# Altium PCB HGD_Sensor(v0.1)-20200807.PcbDoc (part 1 of 3)
Units mil, origin at the board's own origin, x right, y up, seen from the top; angles counter-clockwise.
Board outline 2299.21 x 2125.98 mil, 2 copper layers (TopLayer, BottomLayer); 55 components, 33 nets, 176 pads, 331 vias.
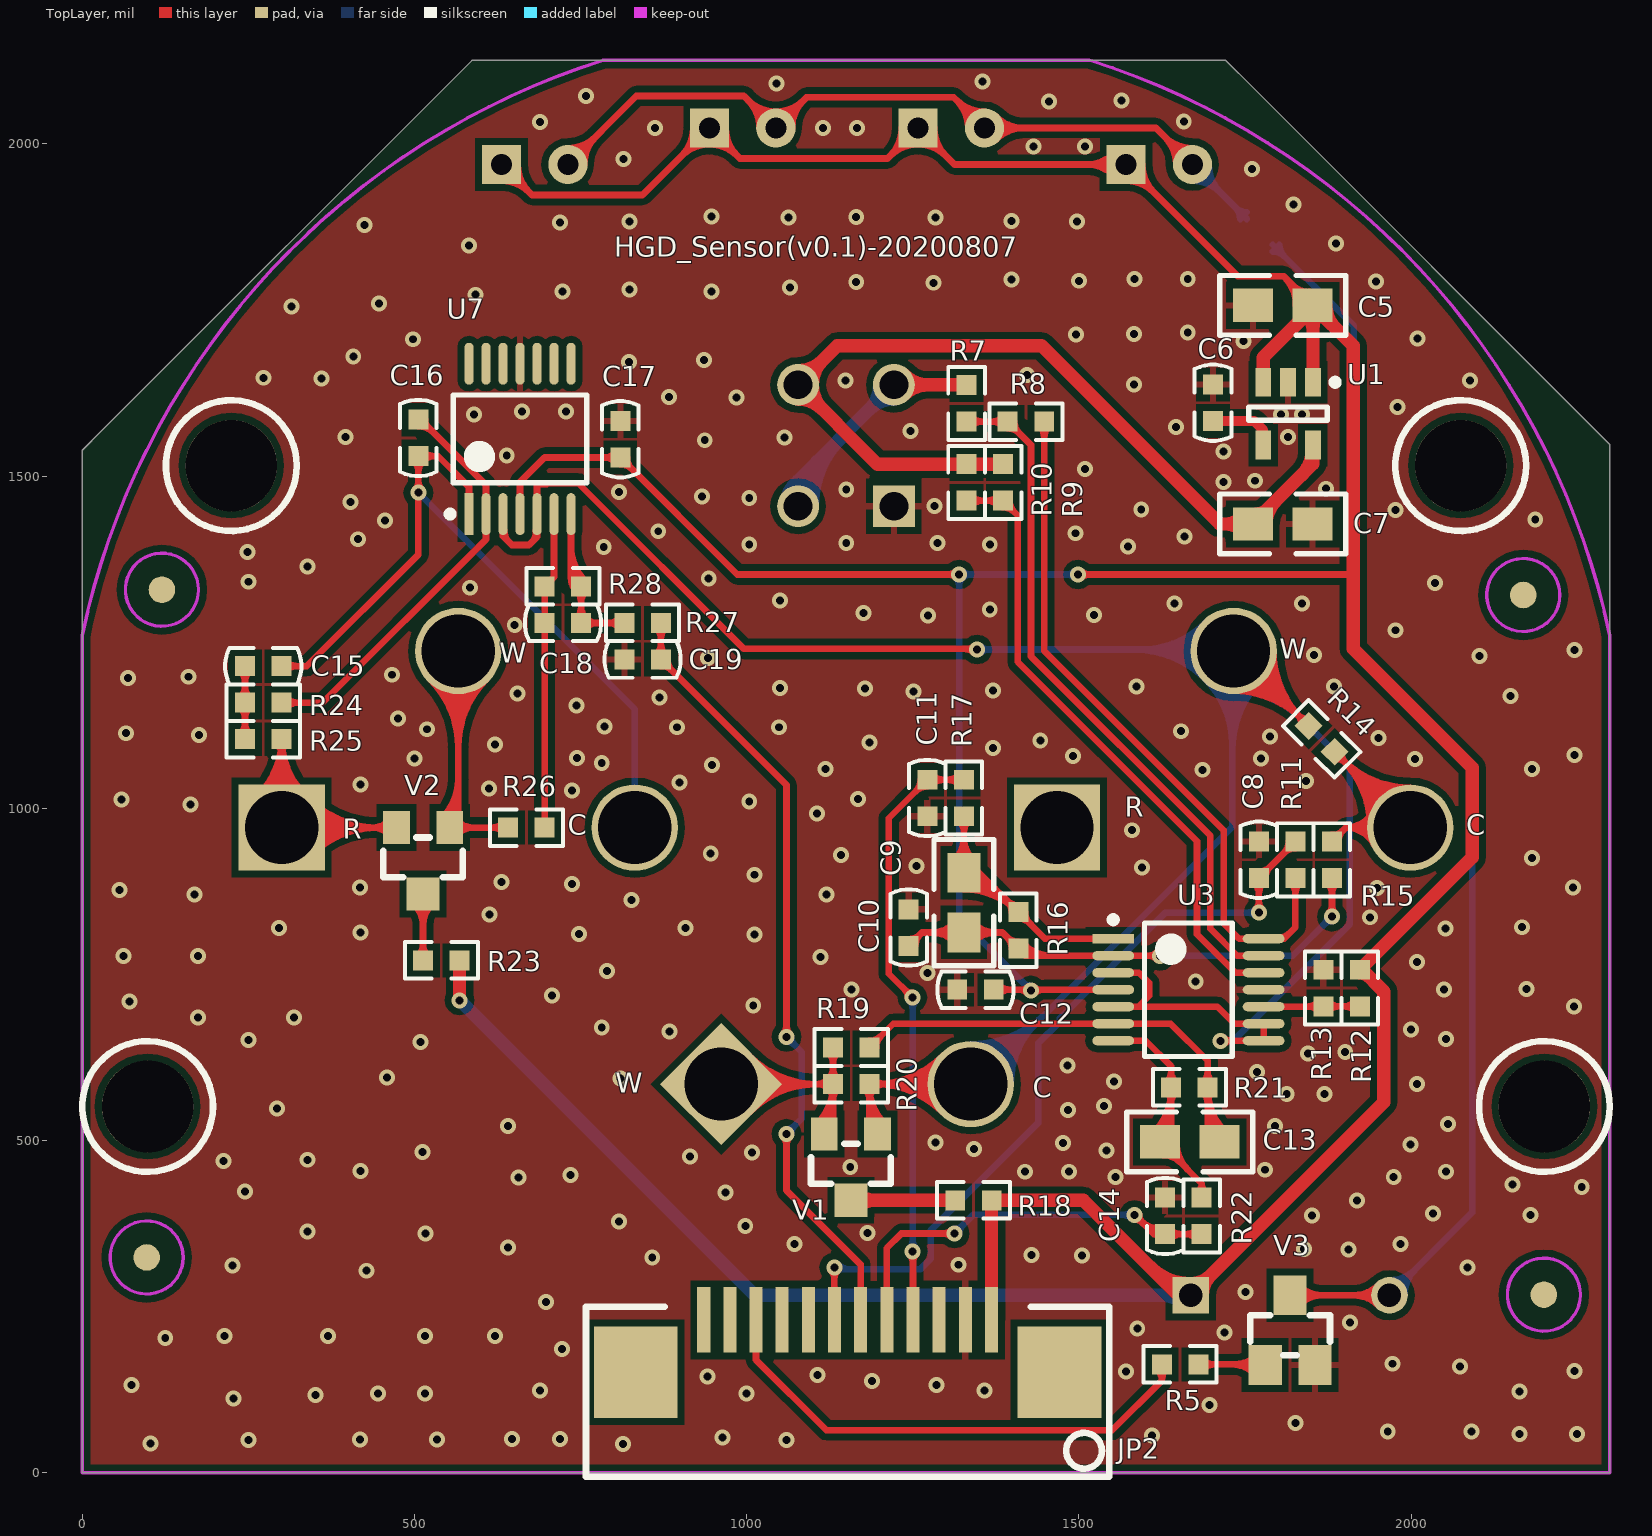
[diagram p0: TopLayer view]
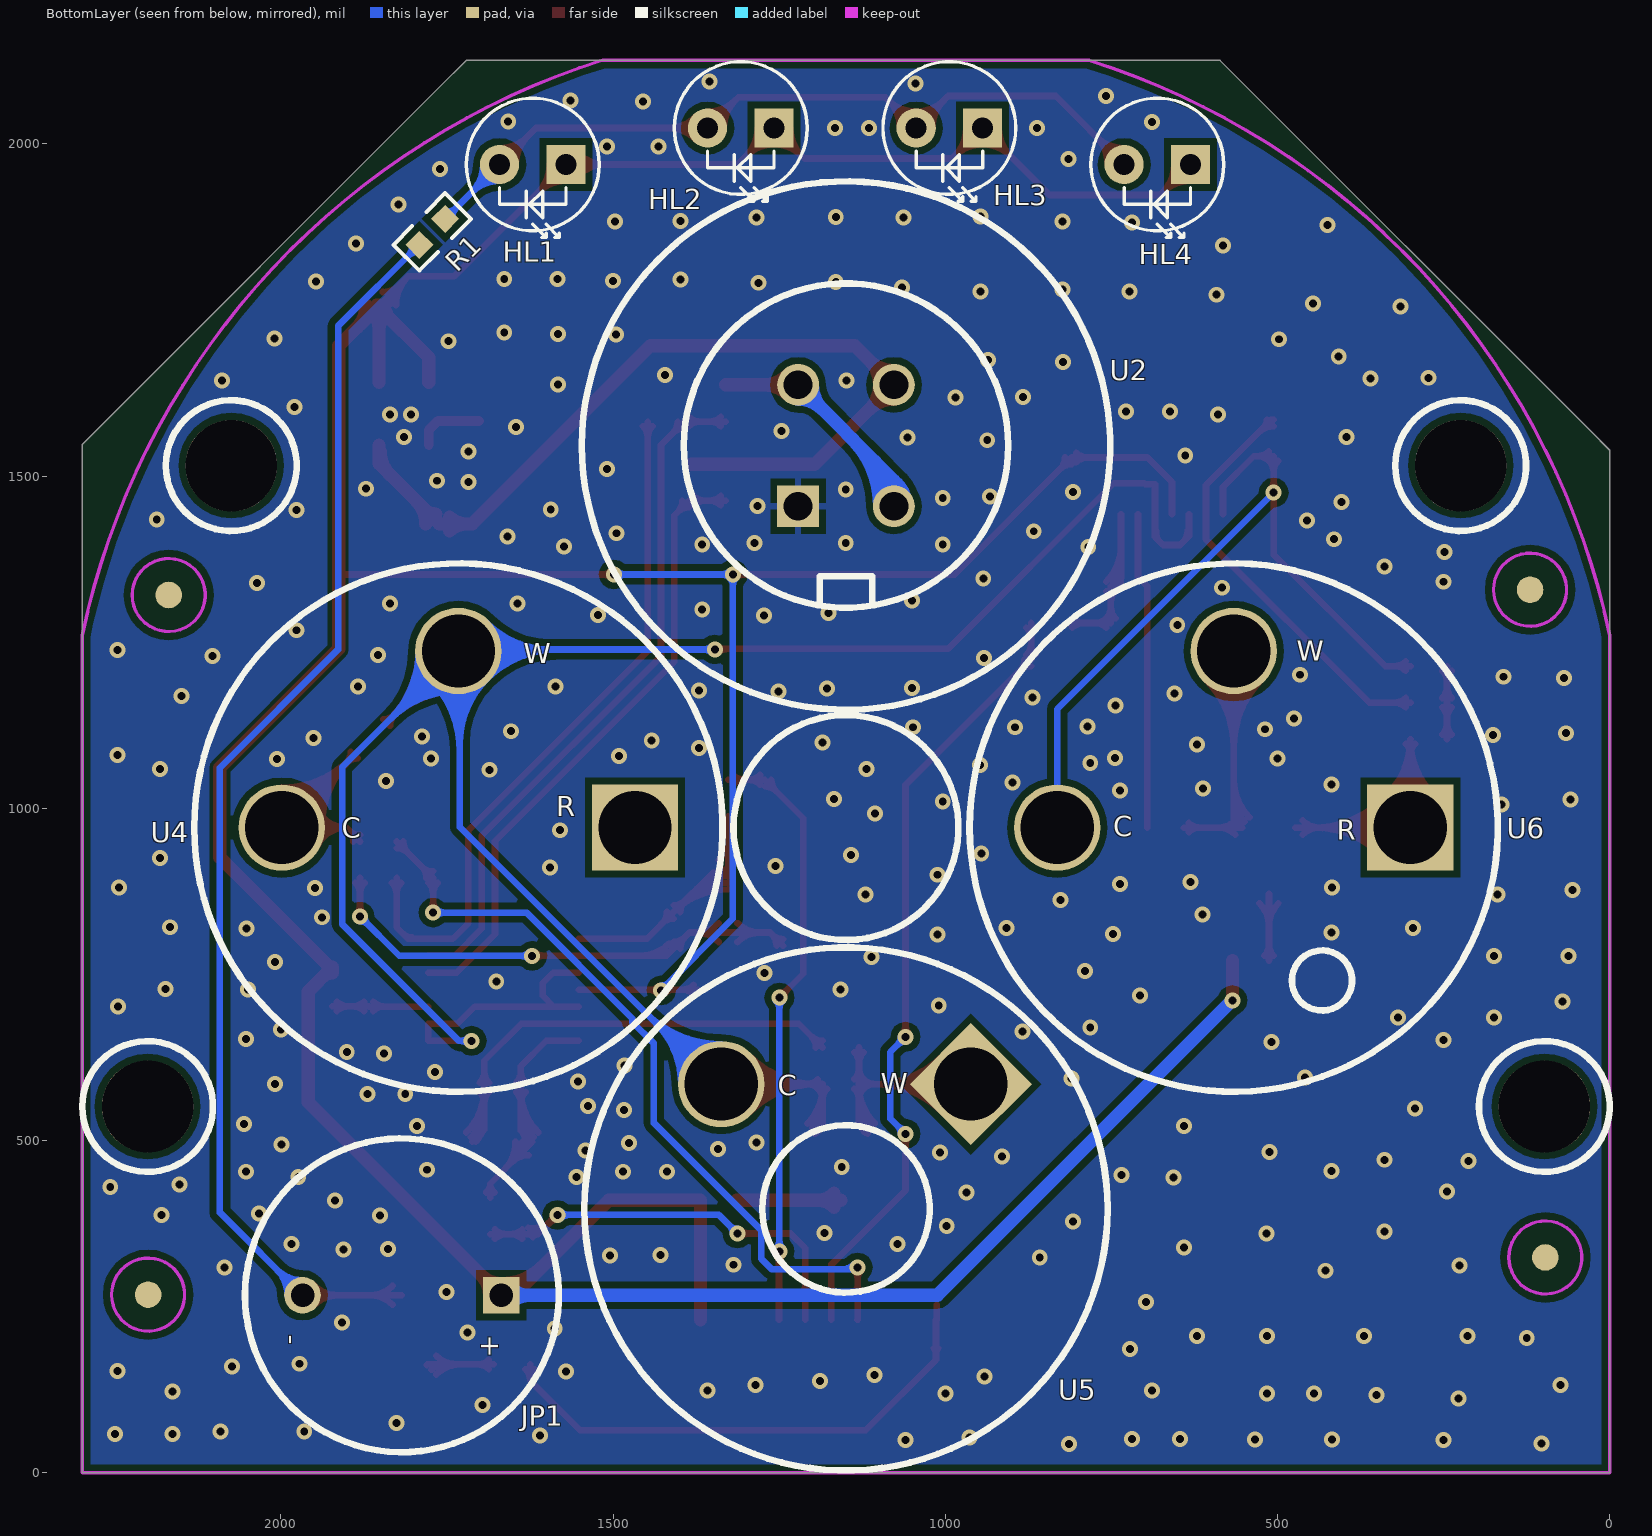
[diagram p1: BottomLayer view, seen from below]

## Layer stack, top to bottom
TopLayer: signal copper 1.4
Dielectric: core 12.6, FR-4, Dk 4.8
BottomLayer: signal copper 1.4

## Board outline
0,0 2299.21,0 2299.21,1547.79 1762,2085 1721.02,2125.98 1515.75,2125.98 783.99,2125.98 783.59,2125.59 586.59,2125.59 30,1569 0,1539 0,1259.84 0,0

## Design rules (kind name [scope] priority, off if disabled: settings)
Clearance Clearance_2 [InNet('RF_IN') vs InNet('GND')] p1: gap=19.68
Clearance [All] p2: gap=10
Clearance Clearance_1 [All] p3: gap=10
ComponentClearance [All] p1 off: gap=10 collisioncheckmode=3 verticalgap=10 showdistances=FALSE
FabricationTestPointUsage TestPointUsage [All] p1: valid=0 allowmultiple=FALSE
FabricationTestpoint Testpoint [(IsPad And (OnTopLayer Or OnBottomLayer))] p1: side=3 testpointundercomponent=TRUE minsize=40 maxsize=100 preferedsize=60 minholesize=20 maxholesize=40 preferedholesize=32 testpointgrid=1 allowsidetop=TRUE allowsidebottom=TRUE usegrid=TRUE gridtolerance=0.01
HoleSize [All] p1: absolutevalues=TRUE maxlimit=200 minlimit=1 maxpercent=80.000 minpercent=20.000
PolygonConnect [IsVia] p1: connectstyle=Direct reliefconductorwidth=10 reliefentries=4 polygonreliefangle="90 Angle"
PolygonConnect PolygonConnect_via [All] p2 off: connectstyle=Relief reliefconductorwidth=10 reliefentries=4 polygonreliefangle="90 Angle"
RoomDefinition HGD_Sensor(v0.1)-20200807 [InComponentClass('HGD_Sensor(v0.1)-20200807')] p1: confinementstyle=ConfineIn formatcopy=TRUE lockcomponents=FALSE outline -14648,-34893 -12648,-34893 -12648,-33893 -14648,-33893
RoutingVias [All] p1: holewidth=15.75 width=31.5 viastyle="Through Hole" minholewidth=11.81 minwidth=23.62 maxholewidth=19.68 maxwidth=39.37
ShortCircuit [All] p1 off: allowed=FALSE
SilkscreenOverComponentPads [All] p1: minsilkscreentomaskgap=10
SolderMaskExpansion [All] p1: expansion=4
Width [All] p1: maxlimit=100 minlimit=5 preferedwidth=10
22 further rules are at their usual default settings.

## Components (designator, comment, footprint, x,y, rotation, side; value= is the part's Value field where it differs from the comment)
C5 "1uF/25V/5%" 0805 1852,1757 r180 top
C6 "10nF/25V/5%" C0603 1702,1583 r90 top
C7 "1uF/25V/5%" 0805 1762,1428 r0 top
C8 "10nF/25V/5%" C0603 1771,895 r90 top
C9 "1uF/25V/5%" 0805 1327,813 r90 top
C10 "10nF/25V/5%" C0603 1244,793 r90 top
C11 "10nF/25V/5%" C0603 1272,1043 r270 top
C12 "100nF/25V/5%" C0603 1317,727 r0 top
C13 "1uF/25V/5%" 0805 1712,498 r180 top
C14 "10nF/25V/5%" C0603 1630,359 r90 top
C15 "10nF/25V/5%" C0603 300,1214 r180 top
C16 "10nF/25V/5%" C0603 506,1585 r270 top
C17 "100nF/25V/5%" C0603 810,1583 r270 top
C18 "10nF/25V/5%" C0603 751,1279 r180 top
C19 "10nF/25V/5%" C0603 871,1224 r180 top
HL1 "LED红灯" LED-3MM 1571,1969 r0 bottom locked
HL2 "LED红灯" LED-3MM 1258,2023.87 r0 bottom locked
HL3 "LED红灯" LED-3MM 944,2023.87 r0 bottom locked
HL4 "LED红灯" LED-3MM 631,1969 r0 bottom locked
JP1 "TMB-12A03" TMB-12A03 1818,267 r270 bottom locked
JP2 "FPC-12P" FPC-1.0MM-12P-W 1152,230 r180 top
R1 "200R/5%" R0603 1753,1887 r315 bottom
R5 "470R/5%" R0603 1625,163 r0 top
R7 "1K/5%" R0603 1331,1582 r90 top
R8 "4K7/5%" R0603 1448,1582 r180 top
R9 "4K7/5%" R0603 1386,1463 r90 top
R10 "4K7/5%" R0603 1331,1463 r90 top
R11 "10K/5%" R0603 1826,950 r270 top
R12 "4K7/5%" R0603 1923,702 r90 top
R13 "4K7/5%" R0603 1868,702 r90 top
R14 "100R/5%" R0603 1846,1124 r315 top
R15 "470R/5%" R0603 1881,950 r270 top
R16 "10K/5%" R0603 1409,844 r270 top
R17 "10K/5%" R0603 1327,1043 r270 top
R18 "1M/5%" R0603 1314,410 r0 top
R19 "200R/5%" R0603 1185,640 r180 top
R20 "200R/5%" R0603 1130,585 r0 top
R21 "47K/5%" R0603 1694,580 r180 top
R22 "10K/5%" R0603 1685,359 r90 top
R23 "1M/5%" R0603 513,771 r0 top
R24 "10K/5%" R0603 300,1159 r180 top
R25 "10K/5%" R0603 245,1104 r0 top
R26 "100R/5%" R0603 641,971 r0 top
R27 "10K/5%" R0603 816,1279 r0 top
R28 "8K2/5%" R0603 696,1334 r0 top
U1 "SGM2019-3.0YN5G/TR" SGM2019_SOT23-5_95P280X125-5N 1815,1594 r270 top
U2 "MC101" MC101 1149.61,1546 r180 bottom locked
U3 "SGM8634" SGM8634_TSSOP14_65P640X120-14N 1665,727 r0 top
U4 "4O2-GP_V2.0" 4O2-GP_V2.0-1.5K-3.2*2.5*5.8 1733,971 r180 bottom locked
U5 "ME2-CO" ME2-CO_1.5K-3.2*2.5*5.8 1149.61,397 r225 bottom locked
U6 "4H2S-AS_V2.0" 4H2S-AS_V2.0-1.5K-3.0*2.5*5.8 566,971 r180 bottom locked
U7 "SGM8634" SGM8634_TSSOP14_65P640X120-14N 659,1556 r90 top
V1 "MMBFJ177LT1G" MMBFJ177LT1G_SOT-23 1157,455 r180 top
V2 "MMBFJ177LT1G" MMBFJ177LT1G_SOT-23 513,916 r180 top
V3 "S8050" SOT-23 1818,267 r0 top locked

## Footprints (in the part's own frame and the unit in brackets; to place one, negate y for a bottom-side part, rotate by r counter-clockwise, add the part's x,y. Pads: shape width x height; smd on the part's side, far side on the other; paste and mask are expansions set on the pad)
4H2S-AS_V2.0-1.5K-3.0*2.5*5.8 [mm] "4H2S-AS_V2.0：H2S传感器，4系列插针"
  rect 3.3x3.3 hole 2.8: 1(6.75,0)
  round 3.3 hole 2.8: 2(0,6.75) 3(-6.75,0)
  silkscreen extent -10.1,-10.1 10.1,10.1
4O2-GP_V2.0-1.5K-3.2*2.5*5.8 [mm] "4O2-GP_V2.0：O2传感器，4系列插针"
  rect 3.3x3.3 hole 2.8: 1(6.75,0)
  round 3.3 hole 2.8: 2(0,6.75) 3(-6.75,0)
  silkscreen extent -10.1,-10.1 10.1,10.1
0805 [mil]
  rect 60x50 smd: 1(0,0) 2(90,0)
  silkscreen extent -50,-45 140,45
C0603 [mil]
  rect 30x30 smd: 1(0,0) 2(55,0)
  silkscreen extent -30,-28 85,28
FPC-1.0MM-12P-W [mm] "FPC-1.0MM-12P-W：卧式，抽拉式上接，12P"
  rect 3.2x3.5 smd: 0(-8.1,2) 0(8.1,2)
  rect 0.5x2.5 smd: 1(-5.5,0) 2(-4.5,0) 3(-3.5,0) 4(-2.5,0) 5(-1.5,0) 6(-0.5,0) 7(0.5,0) 8(1.5,0) 9(2.5,0) 10(3.5,0) 11(4.5,0) 12(5.5,0)
  silkscreen extent -10,-0.5 10,6
LED-3MM [mm]
  rect 1.5x1.5 hole 0.8: A(0,0)
  round 1.5 hole 0.8: K(2.54,0)
  silkscreen extent -1.27,-2.54 3.81,2.79
MC101 [mm] "MC101：可燃气体传感器"
  rect 1.6x1.6 hole 1.1: 1(-1.83,-2.32)
  round 1.6 hole 1.1: 2(1.83,-2.32) 3(1.83,2.32) 4(-1.83,2.32)
  silkscreen extent -10.1,-10.1 10.1,10.1
ME2-CO_1.5K-3.2*2.5*5.8 [mm] "ME2-CO：CO传感器，4系列插针"
  rect 3.3x3.3 hole 2.8: 1(0,6.75)
  round 3.3 hole 2.8: 2(-6.75,0)
  silkscreen extent -10,-10 10,10
MMBFJ177LT1G_SOT-23 [mil]
  rect 40x50 smd: 1(-40,-55) 2(40,-55)
  rect 50x50 smd: 3(0,45)
  silkscreen extent -60,-40 60,20
R0603 [mil] "R0603封装电阻"
  rect 30x30 smd: 1(0,0) 2(55,0)
  silkscreen extent -28,-27 82,28
SGM2019_SOT23-5_95P280X125-5N [mm] "SOT23, 5-Leads, Body 3.0x3.0mm (max), Pitch 0.95mm, IPC Medium Density"
  rect 1.1x0.6 smd: 1(-1.2,0.95) 2(-1.2,0) 3(-1.2,-0.95) 4(1.2,-0.95) 5(1.2,0.95)
  silkscreen extent -1.32,-1.5 0.25,1.93, body extent -0.85,-1.51 0.85,1.51, height 1.25
SGM8634_TSSOP14_65P640X120-14N [mm] "TSOP, 14-Leads, Body 5.1x4.5mm (max), Pitch 0.65mm, IPC Medium Density"
  rect 1.6x0.35 smd: 1(-2.875,1.95)
  oval 1.6x0.35 smd: 2(-2.875,1.3) 3(-2.875,0.65) 4(-2.875,0) 5(-2.875,-0.65) 6(-2.875,-1.3) 7(-2.875,-1.95) 8(2.875,-1.95) 9(2.875,-1.3) 10(2.875,-0.65) 11(2.875,0) 12(2.875,0.65) 13(2.875,1.3) 14(2.875,1.95)
  silkscreen extent -3,-2.55 1.68,2.8, body extent -2.25,-2.55 2.25,2.55, height 1.2
SOT-23 [mil]
  rect 50x60 smd: B(-37.5,-105) C(0,0) E(37.5,-105)
  silkscreen extent -60,-90 60,-30
TMB-12A03 [mm] "TMB-12A03：3.3V有源蜂鸣器"
  rect 1.4x1.4 hole 0.9: 1(0,3.8)
  round 1.4 hole 0.9: 2(0,-3.8)
  silkscreen extent -6,-6 6,6

## Part data
C5 C6 C7 C8 C9 C10 C11 C12 C13 C14 C15 C16 C17 C18 C19: library part CAP, "电容"
HL1 HL2 HL3 HL4: library part 发光二极管, "发光二极管"
JP1: "TMB-12A03：3.3V有源蜂鸣器"
R1 R5 R7 R8 R9 R10 R11 R12 R13 R14 R15 R16 R17 R18 R19 R20 R21 R22 R23 R24 R25 R26 R27 R28: library part RES2, "电阻"
U1: library part SGM2019, "SGM2019：Low Power, Low Dropout, RF Linear Regulators"
U2: "MC101：可燃气体传感器"
U3 U7: "SGM8634：470μA, 6MHz, Rail-to-Rail I/O, CMOS Operational Amplifier"
U4: "4O2-GP_V2.0：O2传感器"
U5: "ME2-CO：CO传感器"
U6: "4H2S-AS_V2.0：H2S传感器"
V1 V2: "MMBFJ177LT1G：P-JFET?Chopper"
V3: library part NPN, "NPN三极管"

## Free pads (board coordinates)
  round 40 smd far side: 0(97,324) 0(120,1329) 0(2169,1321) 0(2200,268)
  round 137.8 hole 137.8: 0(98.43,551.18) 0(224.41,1515.75) 0(2074.8,1515.75) 0(2200.79,551.18)
  round 40 smd: 1(97,324) 1(120,1329) 1(2169,1321) 1(2200,268)
  round 100 on Bottom Solder: 2(97,324) 2(120,1329) 2(2169,1321) 2(2200,268)
  round 100 on Top Solder: 3(97,324) 3(120,1329) 3(2169,1321) 3(2200,268)

## Via types
v1: diameter 24, hole 12, TopLayer to BottomLayer, tented both sides, 331 vias

## Nets (pads, with @x,y where several pads share a name; then routed paths per layer and width w, separated by ;. In a path a pad name is that pad's centre, name@x,y a point inside that pad or via, vN(x,y) a via of type N, cw(c..) or ccw(c..) an arc to the next point about the centre after c; other vN are vias at no path point)
3V: C7.1 R9.2 R10.2 U1.5 U2.3 | length 2908
  TopLayer w20: U2.3@1077.22,1637 U2.3@1077.56,1637.34 ; R9.2@1383,1518 R10.2@1331,1518 1196.9,1518 U2.3@1077.56,1637.34 ; U1.5@1852.4,1546.76 1852.4,1518.4 C7.1@1762,1428 1712,1428 1444,1696 1136.22,1696 U2.3@1077.56,1637.34 ; U2.3@1077.56,1615.84 cw(c1077.56,1563.95) 1114.26,1600.64 ; U2.3@1077.56,1615.84 cw(c1077.56,1563.95) 1114.26,1600.64 ; U2.3@1077.56,1615.84 cw(c1077.56,1563.95) 1114.26,1600.64 ; U2.3@1077.56,1615.84 cw(c1077.56,1563.95) 1114.26,1600.64 ; U2.3@1077.56,1615.84 cw(c1077.56,1563.95) 1114.26,1600.64 ; U2.3@1077.56,1658.83 ccw(c1077.56,1710.73) 1114.26,1674.03 ; U2.3@1077.56,1658.83 ccw(c1077.56,1710.73) 1114.26,1674.03 ; U2.3@1077.56,1658.83 ccw(c1077.56,1710.73) 1114.26,1674.03 ; U2.3@1077.56,1658.83 ccw(c1077.56,1710.73) 1114.26,1674.03 ; U2.3@1077.56,1658.83 ccw(c1077.56,1710.73) 1114.26,1674.03 ; U2.3@1099.06,1637.34 ccw(c1150.95,1637.34) 1114.26,1600.64 ; U2.3@1099.06,1637.34 cw(c1150.95,1637.34) 1114.26,1674.03 ; U2.3@1099.06,1637.34 cw(c1150.95,1637.34) 1114.26,1674.03 ; U2.3@1099.06,1637.34 ccw(c1150.95,1637.34) 1114.26,1600.64 ; U2.3@1099.06,1637.34 cw(c1150.95,1637.34) 1114.26,1674.03 ; U2.3@1099.06,1637.34 ccw(c1150.95,1637.34) 1114.26,1600.64 ; U2.3@1099.06,1637.34 cw(c1150.95,1637.34) 1114.26,1674.03 ; U2.3@1099.06,1637.34 ccw(c1150.95,1637.34) 1114.26,1600.64 ; U2.3@1099.06,1637.34 cw(c1150.95,1637.34) 1114.26,1674.03 ; U2.3@1099.06,1637.34 ccw(c1150.95,1637.34) 1114.26,1600.64 ; 1720.79,1428 cw(c1720.79,1391.79) C7.1@1746.39,1417.39 ; 1720.79,1428 ccw(c1720.79,1464.21) C7.1@1746.39,1438.61 ; 1720.79,1428 ccw(c1720.79,1464.21) C7.1@1746.39,1438.61 ; 1720.79,1428 cw(c1720.79,1391.79) C7.1@1746.39,1417.39 ; 1720.79,1428 ccw(c1720.79,1464.21) C7.1@1746.39,1438.61 ; 1720.79,1428 cw(c1720.79,1391.79) C7.1@1746.39,1417.39 ; 1720.79,1428 ccw(c1720.79,1464.21) C7.1@1746.39,1438.61 ; 1720.79,1428 cw(c1720.79,1391.79) C7.1@1746.39,1417.39 ; 1720.79,1428 ccw(c1720.79,1464.21) C7.1@1746.39,1438.61 ; 1720.79,1428 cw(c1720.79,1391.79) C7.1@1746.39,1417.39 ; C7.1@1767,1443 ccw(c1767,1467.14) C7.1@1784.07,1450.07 ; C7.1@1767,1443 ccw(c1767,1467.14) C7.1@1784.07,1450.07 ; C7.1@1767,1443 ccw(c1767,1467.14) C7.1@1784.07,1450.07 ; C7.1@1767,1443 ccw(c1767,1467.14) C7.1@1784.07,1450.07 ; C7.1@1767,1443 ccw(c1767,1467.14) C7.1@1784.07,1450.07 ; C7.1@1782,1428 cw(c1830.28,1428) 1796.14,1462.14 ; C7.1@1782,1428 cw(c1830.28,1428) 1796.14,1462.14 ; C7.1@1782,1428 cw(c1830.28,1428) 1796.14,1462.14 ; C7.1@1782,1428 cw(c1830.28,1428) 1796.14,1462.14 ; C7.1@1782,1428 cw(c1830.28,1428) 1796.14,1462.14 ; 1836.22,1502.22 ccw(c1801.53,1536.91) U1.5@1850.59,1536.91 ; 1836.22,1502.22 ccw(c1801.53,1536.91) U1.5@1850.59,1536.91 ; 1836.22,1502.22 ccw(c1801.53,1536.91) U1.5@1850.59,1536.91 ; 1836.22,1502.22 ccw(c1801.53,1536.91) U1.5@1850.59,1536.91 ; 1836.22,1502.22 ccw(c1801.53,1536.91) U1.5@1850.59,1536.91
3V3: C5.1 C12.2 C17.2 HL1.A HL2.A HL3.A HL4.A JP1.1 JP2.1 R12.2 R18.2 R23.2 U1.1 U1.3 U3.4 U7.4 | length 16744.6
  TopLayer w10: HL4.A@654,1946 HL4.A@631,1969 677,1923 843.13,1923 HL3.A@944,2023.87 989.87,1978 1212.13,1978 HL2.A@1258,2023.87 1312.87,1969 HL1.A@1571,1969 1739,1801 1808,1801 C5.1@1852,1757 C5.1@1852.4,1756.6 ; U7.4@659,1442.81 659,1491 696,1528 C17.2@810,1528 986,1352 v1(1320,1352) ; C12.2@1372,727 v1@1419,727 ; 1405,727 v1@1419,727 ; v1(1499,1352) 1913,1352 ; U3.4@1551.81,727 v1@1419,727 ; HL4.A@631,1944.47 cw(c631,1885.26) 672.87,1927.13 ; HL4.A@631,1944.47 cw(c631,1885.26) 672.87,1927.13 ; HL4.A@631,1944.47 cw(c631,1885.26) 672.87,1927.13 ; HL4.A@631,1944.47 cw(c631,1885.26) 672.87,1927.13 ; HL4.A@631,1944.47 cw(c631,1885.26) 672.87,1927.13 ; HL4.A@631,1944.47 cw(c631,1885.26) 672.87,1927.13 ; HL4.A@631,1954.47 cw(c631,1919.4) HL4.A@655.8,1944.2 ; HL4.A@631,1954.47 cw(c631,1919.4) HL4.A@655.8,1944.2 ; HL4.A@631,1954.47 cw(c631,1919.4) HL4.A@655.8,1944.2 ; HL4.A@631,1954.47 cw(c631,1919.4) HL4.A@655.8,1944.2 ; HL4.A@631,1954.47 cw(c631,1919.4) HL4.A@655.8,1944.2 ; HL4.A@631,1954.47 cw(c631,1919.4) HL4.A@655.8,1944.2 ; HL4.A@645.53,1969 ccw(c680.6,1969) HL4.A@655.8,1944.2 ; HL4.A@645.53,1969 ccw(c680.6,1969) HL4.A@655.8,1944.2 ; HL4.A@645.53,1969 ccw(c680.6,1969) HL4.A@655.8,1944.2 ; HL4.A@645.53,1969 ccw(c680.6,1969) HL4.A@655.8,1944.2 ; HL4.A@645.53,1969 ccw(c680.6,1969) HL4.A@655.8,1944.2 ; HL4.A@645.53,1969 ccw(c680.6,1969) HL4.A@655.8,1944.2 ; HL4.A@655.53,1969 ccw(c714.74,1969) 672.87,1927.13 ; HL4.A@655.53,1969 ccw(c714.74,1969) 672.87,1927.13 ; HL4.A@655.53,1969 ccw(c714.74,1969) 672.87,1927.13 ; HL4.A@655.53,1969 ccw(c714.74,1969) 672.87,1927.13 ; HL4.A@655.53,1969 ccw(c714.74,1969) 672.87,1927.13 ; HL4.A@655.53,1969 ccw(c714.74,1969) 672.87,1927.13 ; 785.86,1528 ccw(c785.86,1552.14) C17.2@802.93,1535.07 ; 785.86,1528 cw(c785.86,1503.86) C17.2@802.93,1520.93 ; 785.86,1528 ccw(c785.86,1552.14) C17.2@802.93,1535.07 ; 785.86,1528 cw(c785.86,1503.86) C17.2@802.93,1520.93 ; 785.86,1528 ccw(c785.86,1552.14) C17.2@802.93,1535.07 ; 785.86,1528 cw(c785.86,1503.86) C17.2@802.93,1520.93 ; 785.86,1528 ccw(c785.86,1552.14) C17.2@802.93,1535.07 ; 785.86,1528 cw(c785.86,1503.86) C17.2@802.93,1520.93 ; 827.07,1510.93 ccw(c810,1493.86) 810,1518 cw(c810,1493.86) 827.07,1510.93 ; 827.07,1510.93 cw(c844.14,1528) 820,1528 ccw(c844.14,1528) 827.07,1510.93 ; 902.13,1982 cw(c944,1940.13) HL3.A@944,1999.35 ; 902.13,1982 ccw(c860.26,2023.87) HL3.A@919.47,2023.87 ; 902.13,1982 cw(c944,1940.13) HL3.A@944,1999.35 ; 902.13,1982 ccw(c860.26,2023.87) HL3.A@919.47,2023.87 ; 902.13,1982 ccw(c860.26,2023.87) HL3.A@919.47,2023.87 ; 902.13,1982 cw(c944,1940.13) HL3.A@944,1999.35 ; 902.13,1982 ccw(c860.26,2023.87) HL3.A@919.47,2023.87 ; 902.13,1982 cw(c944,1940.13) HL3.A@944,1999.35 ; 902.13,1982 ccw(c860.26,2023.87) HL3.A@919.47,2023.87 ; 902.13,1982 cw(c944,1940.13) HL3.A@944,1999.35 ; 902.13,1982 ccw(c860.26,2023.87) HL3.A@919.47,2023.87 ; 902.13,1982 cw(c944,1940.13) HL3.A@944,1999.35 ; HL3.A@919.2,1999.07 cw(c944,1974.27) HL3.A@944,2009.35 ; HL3.A@919.2,1999.07 ccw(c894.4,2023.87) HL3.A@929.47,2023.87 ; HL3.A@919.2,1999.07 cw(c944,1974.27) HL3.A@944,2009.35 ; HL3.A@919.2,1999.07 ccw(c894.4,2023.87) HL3.A@929.47,2023.87 ; HL3.A@919.2,1999.07 ccw(c894.4,2023.87) HL3.A@929.47,2023.87 ; HL3.A@919.2,1999.07 cw(c944,1974.27) HL3.A@944,2009.35 ; HL3.A@919.2,1999.07 ccw(c894.4,2023.87) HL3.A@929.47,2023.87 ; HL3.A@919.2,1999.07 cw(c944,1974.27) HL3.A@944,2009.35 ; HL3.A@919.2,1999.07 ccw(c894.4,2023.87) HL3.A@929.47,2023.87 ; HL3.A@919.2,1999.07 cw(c944,1974.27) HL3.A@944,2009.35 ; HL3.A@919.2,1999.07 ccw(c894.4,2023.87) HL3.A@929.47,2023.87 ; HL3.A@919.2,1999.07 cw(c944,1974.27) HL3.A@944,2009.35 ; HL3.A@944,1999.35 cw(c944,1940.13) 985.87,1982 ; HL3.A@944,1999.35 cw(c944,1940.13) 985.87,1982 ; HL3.A@944,1999.35 cw(c944,1940.13) 985.87,1982 ; HL3.A@944,1999.35 cw(c944,1940.13) 985.87,1982 ; HL3.A@944,1999.35 cw(c944,1940.13) 985.87,1982 ; HL3.A@944,1999.35 cw(c944,1940.13) 985.87,1982 ; HL3.A@944,2009.35 cw(c944,1974.27) HL3.A@968.8,1999.07 ; HL3.A@944,2009.35 cw(c944,1974.27) HL3.A@968.8,1999.07 ; HL3.A@944,2009.35 cw(c944,1974.27) HL3.A@968.8,1999.07 ; HL3.A@944,2009.35 cw(c944,1974.27) HL3.A@968.8,1999.07 ; HL3.A@944,2009.35 cw(c944,1974.27) HL3.A@968.8,1999.07 ; HL3.A@944,2009.35 cw(c944,1974.27) HL3.A@968.8,1999.07 ; HL3.A@958.53,2023.87 ccw(c993.6,2023.87) HL3.A@968.8,1999.07 ; HL3.A@958.53,2023.87 ccw(c993.6,2023.87) HL3.A@968.8,1999.07 ; HL3.A@958.53,2023.87 ccw(c993.6,2023.87) HL3.A@968.8,1999.07 ; HL3.A@958.53,2023.87 ccw(c993.6,2023.87) HL3.A@968.8,1999.07 ; HL3.A@958.53,2023.87 ccw(c993.6,2023.87) HL3.A@968.8,1999.07 ; HL3.A@958.53,2023.87 ccw(c993.6,2023.87) HL3.A@968.8,1999.07 ; HL3.A@968.53,2023.87 ccw(c1027.74,2023.87) 985.87,1982 ; HL3.A@968.53,2023.87 ccw(c1027.74,2023.87) 985.87,1982 ; HL3.A@968.53,2023.87 ccw(c1027.74,2023.87) 985.87,1982 ; HL3.A@968.53,2023.87 ccw(c1027.74,2023.87) 985.87,1982 ; HL3.A@968.53,2023.87 ccw(c1027.74,2023.87) 985.87,1982 ; HL3.A@968.53,2023.87 ccw(c1027.74,2023.87) 985.87,1982 ; 1216.13,1982 cw(c1258,1940.13) HL2.A@1258,1999.35 ; 1216.13,1982 ccw(c1174.26,2023.87) HL2.A@1233.47,2023.87 ; 1216.13,1982 cw(c1258,1940.13) HL2.A@1258,1999.35 ; 1216.13,1982 ccw(c1174.26,2023.87) HL2.A@1233.47,2023.87 ; 1216.13,1982 ccw(c1174.26,2023.87) HL2.A@1233.47,2023.87 ; 1216.13,1982 cw(c1258,1940.13) HL2.A@1258,1999.35 ; 1216.13,1982 ccw(c1174.26,2023.87) HL2.A@1233.47,2023.87 ; 1216.13,1982 cw(c1258,1940.13) HL2.A@1258,1999.35 ; 1216.13,1982 ccw(c1174.26,2023.87) HL2.A@1233.47,2023.87 ; 1216.13,1982 cw(c1258,1940.13) HL2.A@1258,1999.35 ; 1216.13,1982 ccw(c1174.26,2023.87) HL2.A@1233.47,2023.87 ; 1216.13,1982 cw(c1258,1940.13) HL2.A@1258,1999.35 ; HL2.A@1233.2,1999.07 cw(c1258,1974.27) HL2.A@1258,2009.35 ; HL2.A@1233.2,1999.07 ccw(c1208.4,2023.87) HL2.A@1243.47,2023.87 ; HL2.A@1233.2,1999.07 cw(c1258,1974.27) HL2.A@1258,2009.35 ; HL2.A@1233.2,1999.07 ccw(c1208.4,2023.87) HL2.A@1243.47,2023.87 ; HL2.A@1233.2,1999.07 ccw(c1208.4,2023.87) HL2.A@1243.47,2023.87 ; HL2.A@1233.2,1999.07 cw(c1258,1974.27) HL2.A@1258,2009.35 ; HL2.A@1233.2,1999.07 ccw(c1208.4,2023.87) HL2.A@1243.47,2023.87 ; HL2.A@1233.2,1999.07 cw(c1258,1974.27) HL2.A@1258,2009.35 ; HL2.A@1233.2,1999.07 ccw(c1208.4,2023.87) HL2.A@1243.47,2023.87 ; HL2.A@1233.2,1999.07 cw(c1258,1974.27) HL2.A@1258,2009.35 ; HL2.A@1233.2,1999.07 ccw(c1208.4,2023.87) HL2.A@1243.47,2023.87 ; HL2.A@1233.2,1999.07 cw(c1258,1974.27) HL2.A@1258,2009.35 ; HL2.A@1258,1999.35 cw(c1258,1940.13) 1299.87,1982 ; HL2.A@1258,1999.35 cw(c1258,1940.13) 1299.87,1982 ; HL2.A@1258,1999.35 cw(c1258,1940.13) 1299.87,1982 ; HL2.A@1258,1999.35 cw(c1258,1940.13) 1299.87,1982 ; HL2.A@1258,1999.35 cw(c1258,1940.13) 1299.87,1982 ; HL2.A@1258,1999.35 cw(c1258,1940.13) 1299.87,1982 ; HL2.A@1258,2009.35 cw(c1258,1974.27) HL2.A@1282.8,1999.07 ; HL2.A@1258,2009.35 cw(c1258,1974.27) HL2.A@1282.8,1999.07 ; HL2.A@1258,2009.35 cw(c1258,1974.27) HL2.A@1282.8,1999.07 ; HL2.A@1258,2009.35 cw(c1258,1974.27) HL2.A@1282.8,1999.07 ; HL2.A@1258,2009.35 cw(c1258,1974.27) HL2.A@1282.8,1999.07 ; HL2.A@1258,2009.35 cw(c1258,1974.27) HL2.A@1282.8,1999.07 ; HL2.A@1272.53,2023.87 ccw(c1307.6,2023.87) HL2.A@1282.8,1999.07 ; HL2.A@1272.53,2023.87 ccw(c1307.6,2023.87) HL2.A@1282.8,1999.07 ; HL2.A@1272.53,2023.87 ccw(c1307.6,2023.87) HL2.A@1282.8,1999.07 ; HL2.A@1272.53,2023.87 ccw(c1307.6,2023.87) HL2.A@1282.8,1999.07 ; HL2.A@1272.53,2023.87 ccw(c1307.6,2023.87) HL2.A@1282.8,1999.07 ; HL2.A@1272.53,2023.87 ccw(c1307.6,2023.87) HL2.A@1282.8,1999.07 ; HL2.A@1282.53,2023.87 ccw(c1341.74,2023.87) 1299.87,1982 ; HL2.A@1282.53,2023.87 ccw(c1341.74,2023.87) 1299.87,1982 ; HL2.A@1282.53,2023.87 ccw(c1341.74,2023.87) 1299.87,1982 ; HL2.A@1282.53,2023.87 ccw(c1341.74,2023.87) 1299.87,1982 ; HL2.A@1282.53,2023.87 ccw(c1341.74,2023.87) 1299.87,1982 ; HL2.A@1282.53,2023.87 ccw(c1341.74,2023.87) 1299.87,1982 ; 1303.1,1352 ccw(c1303.1,1368.9) v1@1315.05,1356.95 ; 1303.1,1352 cw(c1303.1,1335.1) v1@1315.05,1347.05 ; 1303.1,1352 ccw(c1303.1,1368.9) v1@1315.05,1356.95 ; 1303.1,1352 cw(c1303.1,1335.1) v1@1315.05,1347.05 ; 1303.1,1352 ccw(c1303.1,1368.9) v1@1315.05,1356.95 ; 1303.1,1352 cw(c1303.1,1335.1) v1@1315.05,1347.05 ; 1303.1,1352 ccw(c1303.1,1368.9) v1@1315.05,1356.95 ; 1303.1,1352 cw(c1303.1,1335.1) v1@1315.05,1347.05 ; C12.2@1379.07,719.93 cw(c1396.14,702.86) 1396.14,727 ; C12.2@1379.07,719.93 cw(c1396.14,702.86) 1396.14,727 ; C12.2@1379.07,719.93 cw(c1396.14,702.86) 1396.14,727 ; C12.2@1379.07,719.93 cw(c1396.14,702.86) 1396.14,727 ; C12.2@1379.07,734.07 ccw(c1396.14,751.14) 1396.14,727 ; C12.2@1379.07,734.07 ccw(c1396.14,751.14) 1396.14,727 ; C12.2@1379.07,734.07 ccw(c1396.14,751.14) 1396.14,727 ; C12.2@1379.07,734.07 ccw(c1396.14,751.14) 1396.14,727 ; 1408.69,727 cw(c1408.69,706.69) v1@1423.05,721.05 ; 1408.69,727 cw(c1408.69,706.69) v1@1423.05,721.05 ; 1408.69,727 cw(c1408.69,706.69) v1@1423.05,721.05 ; 1408.69,727 cw(c1408.69,706.69) v1@1423.05,721.05 ; 1413.51,727 ccw(c1413.51,740.49) v1@1423.05,730.95 ; 1413.51,727 ccw(c1413.51,740.49) v1@1423.05,730.95 ; 1413.51,727 ccw(c1413.51,740.49) v1@1423.05,730.95 ; 1413.51,727 ccw(c1413.51,740.49) v1@1423.05,730.95 ; v1@1503.95,1347.05 cw(c1515.9,1335.1) 1515.9,1352 ; v1@1503.95,1347.05 cw(c1515.9,1335.1) 1515.9,1352 ; v1@1503.95,1347.05 cw(c1515.9,1335.1) 1515.9,1352 ; v1@1503.95,1347.05 cw(c1515.9,1335.1) 1515.9,1352 ; v1@1503.95,1356.95 ccw(c1515.9,1368.9) 1515.9,1352 ; v1@1503.95,1356.95 ccw(c1515.9,1368.9) 1515.9,1352 ; v1@1503.95,1356.95 ccw(c1515.9,1368.9) 1515.9,1352 ; v1@1503.95,1356.95 ccw(c1515.9,1368.9) 1515.9,1352 ; 1511.79,1969 cw(c1511.79,1909.79) HL1.A@1553.66,1951.66 ; 1511.79,1969 ccw(c1511.79,2028.21) HL1.A@1553.66,1986.34 ; 1511.79,1969 cw(c1511.79,1909.79) HL1.A@1553.66,1951.66 ; 1511.79,1969 ccw(c1511.79,2028.21) HL1.A@1553.66,1986.34 ; 1511.79,1969 ccw(c1511.79,2028.21) HL1.A@1553.66,1986.34 ; 1511.79,1969 cw(c1511.79,1909.79) HL1.A@1553.66,1951.66 ; 1511.79,1969 ccw(c1511.79,2028.21) HL1.A@1553.66,1986.34 ; 1511.79,1969 cw(c1511.79,1909.79) HL1.A@1553.66,1951.66 ; 1511.79,1969 ccw(c1511.79,2028.21) HL1.A@1553.66,1986.34 ; 1511.79,1969 cw(c1511.79,1909.79) HL1.A@1553.66,1951.66 ; 1511.79,1969 ccw(c1511.79,2028.21) HL1.A@1553.66,1986.34 ; 1511.79,1969 cw(c1511.79,1909.79) HL1.A@1553.66,1951.66 ; 1535.93,1969 cw(c1535.93,1933.93) HL1.A@1560.73,1958.73 ; 1535.93,1969 ccw(c1535.93,2004.07) HL1.A@1560.73,1979.27 ; 1535.93,1969 cw(c1535.93,1933.93) HL1.A@1560.73,1958.73 ; 1535.93,1969 ccw(c1535.93,2004.07) HL1.A@1560.73,1979.27 ; 1535.93,1969 ccw(c1535.93,2004.07) HL1.A@1560.73,1979.27 ; 1535.93,1969 cw(c1535.93,1933.93) HL1.A@1560.73,1958.73 ; 1535.93,1969 ccw(c1535.93,2004.07) HL1.A@1560.73,1979.27 ; 1535.93,1969 cw(c1535.93,1933.93) HL1.A@1560.73,1958.73 ; 1535.93,1969 ccw(c1535.93,2004.07) HL1.A@1560.73,1979.27 ; 1535.93,1969 cw(c1535.93,1933.93) HL1.A@1560.73,1958.73 ; 1535.93,1969 ccw(c1535.93,2004.07) HL1.A@1560.73,1979.27 ; 1535.93,1969 cw(c1535.93,1933.93) HL1.A@1560.73,1958.73 ; HL1.A@1571,1944.47 cw(c1571,1885.26) 1612.87,1927.13 ; HL1.A@1571,1944.47 cw(c1571,1885.26) 1612.87,1927.13 ; HL1.A@1571,1944.47 cw(c1571,1885.26) 1612.87,1927.13 ; HL1.A@1571,1944.47 cw(c1571,1885.26) 1612.87,1927.13 ; HL1.A@1571,1944.47 cw(c1571,1885.26) 1612.87,1927.13 ; HL1.A@1571,1954.47 cw(c1571,1919.4) HL1.A@1595.8,1944.2 ; HL1.A@1571,1954.47 cw(c1571,1919.4) HL1.A@1595.8,1944.2 ; HL1.A@1571,1954.47 cw(c1571,1919.4) HL1.A@1595.8,1944.2 ; HL1.A@1571,1954.47 cw(c1571,1919.4) HL1.A@1595.8,1944.2 ; HL1.A@1571,1954.47 cw(c1571,1919.4) HL1.A@1595.8,1944.2 ; HL1.A@1585.53,1969 ccw(c1620.6,1969) HL1.A@1595.8,1944.2 ; HL1.A@1585.53,1969 ccw(c1620.6,1969) HL1.A@1595.8,1944.2 ; HL1.A@1585.53,1969 ccw(c1620.6,1969) HL1.A@1595.8,1944.2 ; HL1.A@1585.53,1969 ccw(c1620.6,1969) HL1.A@1595.8,1944.2 ; HL1.A@1585.53,1969 ccw(c1620.6,1969) HL1.A@1595.8,1944.2 ; HL1.A@1595.53,1969 ccw(c1654.74,1969) 1612.87,1927.13 ; HL1.A@1595.53,1969 ccw(c1654.74,1969) 1612.87,1927.13 ; HL1.A@1595.53,1969 ccw(c1654.74,1969) 1612.87,1927.13 ; HL1.A@1595.53,1969 ccw(c1654.74,1969) 1612.87,1927.13 ; HL1.A@1595.53,1969 ccw(c1654.74,1969) 1612.87,1927.13 ; 1809.32,1799.68 cw(c1766.64,1757) C5.1@1827,1757 ; 1809.32,1799.68 cw(c1766.64,1757) C5.1@1827,1757 ; 1809.32,1799.68 cw(c1766.64,1757) C5.1@1827,1757 ; 1809.32,1799.68 cw(c1766.64,1757) C5.1@1827,1757 ; 1809.32,1799.68 cw(c1766.64,1757) C5.1@1827,1757 ; 1821.39,1787.61 ccw(c1847,1813.21) C5.1@1847,1777 ; 1821.39,1787.61 ccw(c1847,1813.21) C5.1@1847,1777 ; 1821.39,1787.61 ccw(c1847,1813.21) C5.1@1847,1777 ; 1821.39,1787.61 ccw(c1847,1813.21) C5.1@1847,1777 ; 1821.39,1787.61 ccw(c1847,1813.21) C5.1@1847,1777 ; 1826.39,1782.61 cw(c1800.79,1757) C5.1@1837,1757 ; 1826.39,1782.61 cw(c1800.79,1757) C5.1@1837,1757 ; 1826.39,1782.61 cw(c1800.79,1757) C5.1@1837,1757 ; 1826.39,1782.61 cw(c1800.79,1757) C5.1@1837,1757 ; 1826.39,1782.61 cw(c1800.79,1757) C5.1@1837,1757 ; v1@1432.95,721.05 cw(c1447.31,706.69) 1447.31,727 ccw(c1447.31,706.69) v1@1432.95,721.05 ; v1@1432.95,730.95 ccw(c1442.49,740.49) 1442.49,727 cw(c1442.49,740.49) v1@1432.95,730.95
  TopLayer w20: v1(568,711) R23.2@568,771 ; JP2.1@1368.54,230 1368.54,409.54 R18.2@1369,410 1507,410 1650,267 JP1.1@1668.39,267 1959,557.61 1959,724.28 1926.28,757 R12.2@1923,757 ; U1.3@1777.6,1641.24 1777.6,1678.6 1852,1753 C5.1@1852,1757 C5.1@1856,1757 ; U1.1@1852.4,1641.24 1852.4,1756.6 1913,1696 1913,1352 1913,1240 2092,1061 2092,926 R12.2@1923,757 ; R12.2@1923,761.28 R12.2@1923,757 ; 1607.02,309.98 ccw(c1668.39,371.36) JP1.1@1668.39,284.56 ; 1607.02,309.98 ccw(c1668.39,371.36) JP1.1@1668.39,284.56 ; 1607.02,309.98 ccw(c1668.39,371.36) JP1.1@1668.39,284.56 ; 1607.02,309.98 ccw(c1668.39,371.36) JP1.1@1668.39,284.56 ; JP1.1@1641.16,275.84 ccw(c1668.39,303.07) JP1.1@1668.39,264.56 ; JP1.1@1641.16,275.84 ccw(c1668.39,303.07) JP1.1@1668.39,264.56 ; JP1.1@1641.16,275.84 ccw(c1668.39,303.07) JP1.1@1668.39,264.56 ; JP1.1@1641.16,275.84 ccw(c1668.39,303.07) JP1.1@1668.39,264.56 ; JP1.1@1668.39,284.56 ccw(c1668.39,326.95) 1698.37,296.98 ; JP1.1@1668.39,284.56 ccw(c1668.39,326.95) 1698.37,296.98 ; 1698.37,296.98 ccw(c1728.34,267) 1685.95,267 cw(c1728.34,267) 1698.37,296.98 ; C5.1@1841.39,1746.39 cw(c1814.82,1719.82) 1852.4,1719.82 ; C5.1@1841.39,1746.39 cw(c1814.82,1719.82) 1852.4,1719.82 ; C5.1@1841.39,1746.39 cw(c1814.82,1719.82) 1852.4,1719.82 ; C5.1@1841.39,1746.39 cw(c1814.82,1719.82) 1852.4,1719.82 ; C5.1@1841.39,1746.39 cw(c1814.82,1719.82) 1852.4,1719.82 ; 1852.4,1721.76 cw(c1887.24,1721.76) C5.1@1862.61,1746.39 ; 1852.4,1721.76 cw(c1887.24,1721.76) C5.1@1862.61,1746.39 ; 1852.4,1721.76 cw(c1887.24,1721.76) C5.1@1862.61,1746.39 ; 1852.4,1721.76 cw(c1887.24,1721.76) C5.1@1862.61,1746.39 ; 1852.4,1721.76 cw(c1887.24,1721.76) C5.1@1862.61,1746.39 ; C5.1@1857,1742 cw(c1857,1717.86) C5.1@1874.07,1734.93 ; C5.1@1857,1742 cw(c1857,1717.86) C5.1@1874.07,1734.93 ; C5.1@1857,1742 cw(c1857,1717.86) C5.1@1874.07,1734.93 ; C5.1@1857,1742 cw(c1857,1717.86) C5.1@1874.07,1734.93 ; C5.1@1857,1742 cw(c1857,1717.86) C5.1@1874.07,1734.93 ; C5.1@1872,1757 ccw(c1920.28,1757) 1886.14,1722.86 ; C5.1@1872,1757 ccw(c1920.28,1757) 1886.14,1722.86 ; C5.1@1872,1757 ccw(c1920.28,1757) 1886.14,1722.86 ; C5.1@1872,1757 ccw(c1920.28,1757) 1886.14,1722.86 ; C5.1@1872,1757 ccw(c1920.28,1757) 1886.14,1722.86 ; R12.2@1923,752 cw(c1923,732) R12.2@1937.14,746.14 ; R12.2@1923,752 cw(c1923,732) R12.2@1937.14,746.14 ; R12.2@1923,752 cw(c1923,732) R12.2@1937.14,746.14 ; R12.2@1923,752 cw(c1923,732) R12.2@1937.14,746.14 ; R12.2@1923,752 cw(c1923,732) R12.2@1937.14,746.14
  BottomLayer w10: v1(1428,726) 1320,834 v1(1320,1352) v1(1499,1352) ; v1@1315.05,1347.05 cw(c1303.1,1335.1) 1320,1335.1 ; v1@1315.05,1347.05 cw(c1303.1,1335.1) 1320,1335.1 ; v1@1315.05,1347.05 cw(c1303.1,1335.1) 1320,1335.1 ; v1@1315.05,1347.05 cw(c1303.1,1335.1) 1320,1335.1 ; 1320,1335.1 cw(c1336.9,1335.1) v1@1324.95,1347.05 ; 1320,1335.1 cw(c1336.9,1335.1) v1@1324.95,1347.05 ; 1320,1335.1 cw(c1336.9,1335.1) v1@1324.95,1347.05 ; 1320,1335.1 cw(c1336.9,1335.1) v1@1324.95,1347.05 ; v1@1324.95,1347.05 cw(c1336.9,1335.1) 1336.9,1352 ; v1@1324.95,1347.05 cw(c1336.9,1335.1) 1336.9,1352 ; v1@1324.95,1347.05 cw(c1336.9,1335.1) 1336.9,1352 ; v1@1324.95,1347.05 cw(c1336.9,1335.1) 1336.9,1352 ; v1@1324.95,1356.95 ccw(c1336.9,1368.9) 1336.9,1352 ; v1@1324.95,1356.95 ccw(c1336.9,1368.9) 1336.9,1352 ; v1@1324.95,1356.95 ccw(c1336.9,1368.9) 1336.9,1352 ; v1@1324.95,1356.95 ccw(c1336.9,1368.9) 1336.9,1352 ; 1416.05,737.95 ccw(c1428,749.9) v1@1428,733 ; 1416.05,737.95 cw(c1404.1,726) v1@1421,726 ; 1416.05,737.95 ccw(c1428,749.9) v1@1428,733 ; 1416.05,737.95 cw(c1404.1,726) v1@1421,726 ; 1416.05,737.95 ccw(c1428,749.9) v1@1428,733 ; 1416.05,737.95 cw(c1404.1,726) v1@1421,726 ; 1416.05,737.95 ccw(c1428,749.9) v1@1428,733 ; 1416.05,737.95 cw(c1404.1,726) v1@1421,726 ; 1482.1,1352 ccw(c1482.1,1368.9) v1@1494.05,1356.95 ; 1482.1,1352 cw(c1482.1,1335.1) v1@1494.05,1347.05 ; 1482.1,1352 ccw(c1482.1,1368.9) v1@1494.05,1356.95 ; 1482.1,1352 cw(c1482.1,1335.1) v1@1494.05,1347.05 ; 1482.1,1352 ccw(c1482.1,1368.9) v1@1494.05,1356.95 ; 1482.1,1352 cw(c1482.1,1335.1) v1@1494.05,1347.05 ; 1482.1,1352 ccw(c1482.1,1368.9) v1@1494.05,1356.95 ; 1482.1,1352 cw(c1482.1,1335.1) v1@1494.05,1347.05
  BottomLayer w20: v1(568,711) 1012,267 JP1.1@1668.39,267 ; 1626,267 ccw(c1626,309.39) 1655.98,279.42 cw(c1626,309.39) 1626,267 ; 1626,267 cw(c1626,224.61) 1655.98,254.58 ccw(c1626,224.61) 1626,267
ADC_CO: C14.1 JP2.5 R22.1 | length 1626.9
  TopLayer w10: JP2.5@1211.06,230 1211.06,338.06 1233,360 v1(1313,360) ; v1(1584,388) 1613,359 ; R22.1@1685,359 C14.1@1630,359 ; JP2.5@1207.63,272.79 ccw(c1199.36,281.06) 1211.06,281.06 ; JP2.5@1207.63,272.79 ccw(c1199.36,281.06) 1211.06,281.06 ; JP2.5@1207.63,272.79 ccw(c1199.36,281.06) 1211.06,281.06 ; JP2.5@1207.63,272.79 ccw(c1199.36,281.06) 1211.06,281.06 ; 1211.06,281.06 ccw(c1222.75,281.06) JP2.5@1214.48,272.79 ; 1211.06,281.06 ccw(c1222.75,281.06) JP2.5@1214.48,272.79 ; 1211.06,281.06 ccw(c1222.75,281.06) JP2.5@1214.48,272.79 ; 1211.06,281.06 ccw(c1222.75,281.06) JP2.5@1214.48,272.79 ; 1296.1,360 ccw(c1296.1,376.9) v1@1308.05,364.95 ; 1296.1,360 cw(c1296.1,343.1) v1@1308.05,355.05 ; 1296.1,360 ccw(c1296.1,376.9) v1@1308.05,364.95 ; 1296.1,360 cw(c1296.1,343.1) v1@1308.05,355.05 ; 1296.1,360 ccw(c1296.1,376.9) v1@1308.05,364.95 ; 1296.1,360 cw(c1296.1,343.1) v1@1308.05,355.05 ; 1296.1,360 ccw(c1296.1,376.9) v1@1308.05,364.95 ; 1296.1,360 cw(c1296.1,343.1) v1@1308.05,355.05 ; v1@1584,381 cw(c1584,364.1) 1595.95,376.05 ; v1@1584,381 cw(c1584,364.1) 1595.95,376.05 ; v1@1584,381 cw(c1584,364.1) 1595.95,376.05 ; v1@1584,381 cw(c1584,364.1) 1595.95,376.05 ; v1@1591,388 ccw(c1607.9,388) 1595.95,376.05 ; v1@1591,388 ccw(c1607.9,388) 1595.95,376.05 ; v1@1591,388 ccw(c1607.9,388) 1595.95,376.05 ; v1@1591,388 ccw(c1607.9,388) 1595.95,376.05 ; 1613,359 ccw(c1613,368.45) C14.1@1621.26,363.86 ; 1613,359 cw(c1613,349.55) C14.1@1621.26,354.14 ; 1613,359 ccw(c1613,368.45) C14.1@1621.26,363.86 ; 1613,359 cw(c1613,349.55) C14.1@1621.26,354.14 ; 1613,359 ccw(c1613,368.45) C14.1@1621.26,363.86 ; 1613,359 cw(c1613,349.55) C14.1@1621.26,354.14 ; 1613,359 ccw(c1613,368.45) C14.1@1621.26,363.86 ; 1613,359 cw(c1613,349.55) C14.1@1621.26,354.14 ; 1613,359 C14.1@1630,359 ; C14.1@1630,359 cw(c1624.66,385.32) 1605.67,366.33 ccw(c1624.66,385.32) C14.1@1630,359 ; C14.1@1637.07,351.93 cw(c1654.14,334.86) 1654.14,359 ; C14.1@1637.07,351.93 cw(c1654.14,334.86) 1654.14,359 ; C14.1@1637.07,351.93 cw(c1654.14,334.86) 1654.14,359 ; C14.1@1637.07,351.93 cw(c1654.14,334.86) 1654.14,359 ; C14.1@1637.07,366.07 ccw(c1654.14,383.14) 1654.14,359 ; C14.1@1637.07,366.07 ccw(c1654.14,383.14) 1654.14,359 ; C14.1@1637.07,366.07 ccw(c1654.14,383.14) 1654.14,359 ; C14.1@1637.07,366.07 ccw(c1654.14,383.14) 1654.14,359 ; 1660.86,359 ccw(c1660.86,383.14) R22.1@1677.93,366.07 ; 1660.86,359 cw(c1660.86,334.86) R22.1@1677.93,351.93 ; 1660.86,359 ccw(c1660.86,383.14) R22.1@1677.93,366.07 ; 1660.86,359 cw(c1660.86,334.86) R22.1@1677.93,351.93 ; 1660.86,359 ccw(c1660.86,383.14) R22.1@1677.93,366.07 ; 1660.86,359 cw(c1660.86,334.86) R22.1@1677.93,351.93 ; 1660.86,359 ccw(c1660.86,383.14) R22.1@1677.93,366.07 ; 1660.86,359 cw(c1660.86,334.86) R22.1@1677.93,351.93 ; 1592.5,379.5 ccw(c1620.22,407.22) 1628.01,368.8 cw(c1620.22,407.22) 1592.5,379.5
  BottomLayer w10: v1(1313,360) 1341,388 v1(1584,388) ; v1@1313,367 ccw(c1313,383.9) 1324.95,371.95 ; v1@1313,367 ccw(c1313,383.9) 1324.95,371.95 ; v1@1313,367 ccw(c1313,383.9) 1324.95,371.95 ; v1@1313,367 ccw(c1313,383.9) 1324.95,371.95 ; v1@1320,360 cw(c1336.9,360) 1324.95,371.95 ; v1@1320,360 cw(c1336.9,360) 1324.95,371.95 ; v1@1320,360 cw(c1336.9,360) 1324.95,371.95 ; v1@1320,360 cw(c1336.9,360) 1324.95,371.95 ; 1567.1,388 ccw(c1567.1,404.9) v1@1579.05,392.95 ; 1567.1,388 cw(c1567.1,371.1) v1@1579.05,383.05 ; 1567.1,388 ccw(c1567.1,404.9) v1@1579.05,392.95 ; 1567.1,388 cw(c1567.1,371.1) v1@1579.05,383.05 ; 1567.1,388 ccw(c1567.1,404.9) v1@1579.05,392.95 ; 1567.1,388 cw(c1567.1,371.1) v1@1579.05,383.05 ; 1567.1,388 ccw(c1567.1,404.9) v1@1579.05,392.95 ; 1567.1,388 cw(c1567.1,371.1) v1@1579.05,383.05
ADC_H2S: C19.1 JP2.6 R27.2 | length 2205.8
  TopLayer w10: R27.2@871,1279 C19.1@871,1224 1060,1035 v1(1060,656) ; v1(1060,510) 1060,425 1171.68,313.32 JP2.6@1171.68,230 1171.68,292.32 ; C19.1@863.93,1231.07 ccw(c846.86,1248.14) 871,1248.14 ; C19.1@863.93,1231.07 ccw(c846.86,1248.14) 871,1248.14 ; C19.1@863.93,1231.07 ccw(c846.86,1248.14) 871,1248.14 ; C19.1@863.93,1231.07 ccw(c846.86,1248.14) 871,1248.14 ; R27.2@863.93,1271.93 cw(c846.86,1254.86) 871,1254.86 ; R27.2@863.93,1271.93 cw(c846.86,1254.86) 871,1254.86 ; R27.2@863.93,1271.93 cw(c846.86,1254.86) 871,1254.86 ; R27.2@863.93,1271.93 cw(c846.86,1254.86) 871,1254.86 ; 871,1248.14 ccw(c895.14,1248.14) C19.1@878.07,1231.07 ; 871,1248.14 ccw(c895.14,1248.14) C19.1@878.07,1231.07 ; 871,1248.14 ccw(c895.14,1248.14) C19.1@878.07,1231.07 ; 871,1248.14 ccw(c895.14,1248.14) C19.1@878.07,1231.07 ; 871,1254.86 cw(c895.14,1254.86) R27.2@878.07,1271.93 ; 871,1254.86 cw(c895.14,1254.86) R27.2@878.07,1271.93 ; 871,1254.86 cw(c895.14,1254.86) R27.2@878.07,1271.93 ; 871,1254.86 cw(c895.14,1254.86) R27.2@878.07,1271.93 ; 888.07,1206.93 ccw(c871,1189.86) 871,1214 cw(c871,1189.86) 888.07,1206.93 ; 888.07,1206.93 cw(c905.14,1224) 881,1224 ccw(c905.14,1224) 888.07,1206.93 ; v1@1055.05,505.05 cw(c1043.1,493.1) 1060,493.1 ; v1@1055.05,505.05 cw(c1043.1,493.1) 1060,493.1 ; v1@1055.05,505.05 cw(c1043.1,493.1) 1060,493.1 ; v1@1055.05,505.05 cw(c1043.1,493.1) 1060,493.1 ; v1@1055.05,660.95 ccw(c1043.1,672.9) 1060,672.9 ; v1@1055.05,660.95 ccw(c1043.1,672.9) 1060,672.9 ; v1@1055.05,660.95 ccw(c1043.1,672.9) 1060,672.9 ; v1@1055.05,660.95 ccw(c1043.1,672.9) 1060,672.9 ; 1060,493.1 cw(c1076.9,493.1) v1@1064.95,505.05 ; 1060,493.1 cw(c1076.9,493.1) v1@1064.95,505.05 ; 1060,493.1 cw(c1076.9,493.1) v1@1064.95,505.05 ; 1060,493.1 cw(c1076.9,493.1) v1@1064.95,505.05 ; 1060,672.9 ccw(c1076.9,672.9) v1@1064.95,660.95 ; 1060,672.9 ccw(c1076.9,672.9) v1@1064.95,660.95 ; 1060,672.9 ccw(c1076.9,672.9) v1@1064.95,660.95 ; 1060,672.9 ccw(c1076.9,672.9) v1@1064.95,660.95 ; JP2.6@1168.26,272.79 ccw(c1159.99,281.06) 1171.68,281.06 ; JP2.6@1168.26,272.79 ccw(c1159.99,281.06) 1171.68,281.06 ; JP2.6@1168.26,272.79 ccw(c1159.99,281.06) 1171.68,281.06 ; JP2.6@1168.26,272.79 ccw(c1159.99,281.06) 1171.68,281.06 ; JP2.6@1168.26,272.79 ccw(c1159.99,281.06) 1171.68,281.06 ; JP2.6@1168.26,272.79 ccw(c1159.99,281.06) 1171.68,281.06 ; JP2.6@1168.26,272.79 ccw(c1159.99,281.06) 1171.68,281.06 ; JP2.6@1168.26,272.79 ccw(c1159.99,281.06) 1171.68,281.06 ; 1171.68,281.06 ccw(c1183.38,281.06) JP2.6@1175.11,272.79 ; 1171.68,281.06 ccw(c1183.38,281.06) JP2.6@1175.11,272.79 ; 1171.68,281.06 ccw(c1183.38,281.06) JP2.6@1175.11,272.79 ; 1171.68,281.06 ccw(c1183.38,281.06) JP2.6@1175.11,272.79 ; 1171.68,281.06 ccw(c1183.38,281.06) JP2.6@1175.11,272.79 ; 1171.68,281.06 ccw(c1183.38,281.06) JP2.6@1175.11,272.79 ; 1171.68,281.06 ccw(c1183.38,281.06) JP2.6@1175.11,272.79 ; 1171.68,281.06 ccw(c1183.38,281.06) JP2.6@1175.11,272.79
  BottomLayer w10: v1(1060,510) 1083,533 1083,633 v1(1060,656) ; v1@1060,517 ccw(c1060,533.9) 1071.95,521.95 ; v1@1060,517 ccw(c1060,533.9) 1071.95,521.95 ; v1@1060,517 ccw(c1060,533.9) 1071.95,521.95 ; v1@1060,517 ccw(c1060,533.9) 1071.95,521.95 ; v1@1060,649 cw(c1060,632.1) 1071.95,644.05 ; v1@1060,649 cw(c1060,632.1) 1071.95,644.05 ; v1@1060,649 cw(c1060,632.1) 1071.95,644.05 ; v1@1060,649 cw(c1060,632.1) 1071.95,644.05 ; v1@1067,510 cw(c1083.9,510) 1071.95,521.95 ; v1@1067,510 cw(c1083.9,510) 1071.95,521.95 ; v1@1067,510 cw(c1083.9,510) 1071.95,521.95 ; v1@1067,510 cw(c1083.9,510) 1071.95,521.95 ; v1@1067,656 ccw(c1083.9,656) 1071.95,644.05 ; v1@1067,656 ccw(c1083.9,656) 1071.95,644.05 ; v1@1067,656 ccw(c1083.9,656) 1071.95,644.05 ; v1@1067,656 ccw(c1083.9,656) 1071.95,644.05